# Altium PCB PCB2.PcbDoc (part 2 of 3)
Units mm, origin at the board's own origin, x right, y up, seen from the top; angles counter-clockwise.
Board outline 89.15 x 51.05 mm, 2 copper layers (Top Layer, Bottom Layer); 28 components, 20 nets, 117 pads, 27 vias.
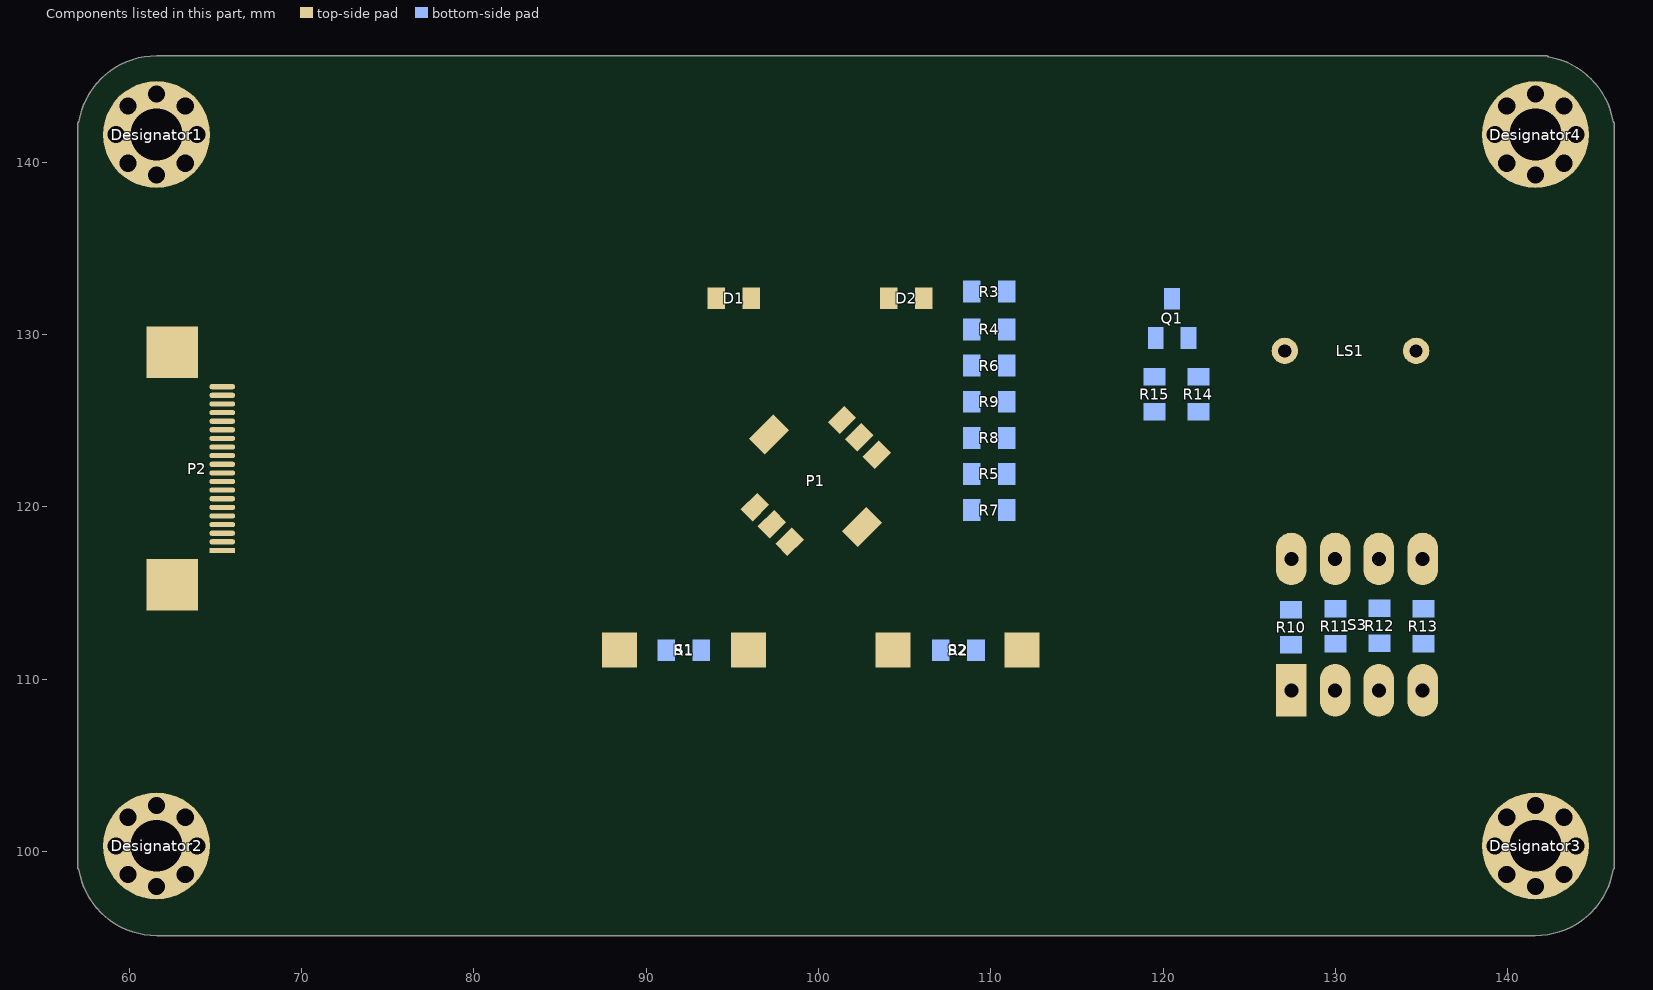
[diagram p2: the components of this part, seen from the top]

## Via types
v1: diameter 0.6, hole 0.3, Top Layer to Bottom Layer, 21 vias
v2: diameter 0.8, hole 0.4, Top Layer to Bottom Layer, 4 vias
v3: diameter 0.7, hole 0.7, Top Layer to Bottom Layer, 1 vias
v4: diameter 1, hole 1, Top Layer to Bottom Layer, 1 vias

## Nets (pads, with @x,y where several pads share a name; then routed paths per layer and width w, separated by ;. In a path a pad name is that pad's centre, name@x,y a point inside that pad or via, vN(x,y) a via of type N, cw(c..) or ccw(c..) an arc to the next point about the centre after c; other vN are vias at no path point) (continued)
copper on no net: (continued)
  Top Layer w0.009: 104.016,98.18 108.562,98.18 ; 104.016,98.189 108.562,98.189 ; 104.016,98.198 108.562,98.198 ; 104.016,98.207 108.562,98.207 ; 104.016,98.215 105.566,98.215 ; 104.016,98.224 105.584,98.224 ; 104.016,98.233 105.566,98.233 ; 104.016,98.242 105.521,98.242 ; 104.016,98.251 105.53,98.251 ; 104.016,98.26 105.468,98.26 ; 104.016,98.269 105.468,98.269 ; 104.016,98.278 105.406,98.278 ; 104.016,98.287 105.432,98.287 ; 104.016,98.295 105.432,98.295 ; 104.016,98.304 105.37,98.304 ; 104.016,98.313 105.388,98.313 ; 104.016,98.322 105.344,98.322 ; 104.016,98.331 105.326,98.331 ; 104.016,98.34 105.281,98.34 ; 104.016,98.349 105.29,98.349 ; 104.016,98.358 105.299,98.358 ; 104.016,98.367 105.228,98.367 ; 104.016,98.375 105.255,98.375 ; 104.016,98.384 105.219,98.384 ; 104.016,98.393 105.201,98.393 ; 104.016,98.402 105.175,98.402 ; 104.016,98.411 105.184,98.411 ; 104.016,98.42 105.157,98.42 ; 104.016,98.429 105.121,98.429 ; 104.016,98.438 105.139,98.438 ; 104.016,98.447 105.112,98.447 ; 104.016,98.455 105.104,98.455 ; 104.016,98.464 105.086,98.464 ; 104.016,98.473 105.059,98.473 ; 104.016,98.482 105.05,98.482 ; 104.016,98.491 105.041,98.491 ; 104.016,98.5 105.041,98.5 ; 104.016,98.509 104.997,98.509 ; 104.016,98.518 104.961,98.518 ; 104.016,98.527 104.979,98.527 ; 104.016,98.535 104.979,98.535 ; 104.016,98.544 104.952,98.544 ; 104.016,98.553 104.943,98.553 ; 104.016,98.562 104.926,98.562 ; 104.016,98.571 104.935,98.571 ; 104.016,98.58 104.899,98.58 ; 104.016,98.589 104.899,98.589 ; 104.016,98.598 104.899,98.598 ; 104.016,98.607 104.863,98.607 ; 104.016,98.615 104.881,98.615 ; 104.016,98.624 104.837,98.624 ; 104.016,98.633 104.855,98.633 ; 104.016,98.642 104.819,98.642 ; 104.016,98.651 104.801,98.651 ; 104.016,98.66 104.828,98.66 ; 104.016,98.669 104.801,98.669 ; 104.016,98.678 104.801,98.678 ; 104.016,98.687 104.775,98.687 ; 104.016,98.696 104.783,98.696 ; 104.016,98.704 104.748,98.704 ; 104.016,98.713 104.739,98.713 ; 104.016,98.722 104.766,98.722 ; 104.016,98.731 104.721,98.731 ; 104.016,98.74 104.739,98.74 ; 104.016,98.749 104.712,98.749 ; 104.016,98.758 104.712,98.758 ; 104.016,98.767 104.686,98.767 ; 104.016,98.776 104.695,98.776 ; 104.016,98.784 104.677,98.784 ; 104.016,98.793 104.677,98.793 ; 104.016,98.802 104.659,98.802 ; 104.016,98.811 104.659,98.811 ; 104.016,98.82 104.659,98.82 ; 104.016,98.829 104.641,98.829 ; 104.016,98.838 104.641,98.838 ; 104.016,98.847 104.606,98.847 ; 104.016,98.856 104.615,98.856 ; 104.016,98.864 104.597,98.864 ; 104.016,98.873 104.597,98.873 ; 104.016,98.882 104.579,98.882 ; 104.016,98.891 104.579,98.891 ; 104.016,98.9 104.579,98.9 ; 104.016,98.909 104.561,98.909 ; 104.016,98.918 104.561,98.918 ; 104.016,98.927 104.535,98.927 ; 104.016,98.936 104.535,98.936 ; 104.016,98.944 104.526,98.944 ; 104.016,98.953 104.517,98.953 ; 104.016,98.962 104.526,98.962 ; 104.016,98.971 104.517,98.971 ; 104.016,98.98 104.499,98.98 ; 104.016,98.989 104.481,98.989 ; 104.016,98.998 104.472,98.998 ; 104.016,99.007 104.472,99.007 ; 104.016,99.016 104.481,99.016 ; 104.016,99.024 104.472,99.024 ; 104.016,99.033 104.463,99.033 ; 104.016,99.042 104.455,99.042 ; 104.016,99.051 104.437,99.051 ; 104.016,99.06 104.455,99.06 ; 104.016,99.069 104.437,99.069 ; 104.016,99.078 104.437,99.078 ; 104.016,99.087 104.437,99.087 ; 104.016,99.096 104.419,99.096 ; 104.016,99.104 104.41,99.104 ; 104.016,99.113 104.392,99.113 ; 104.016,99.122 104.401,99.122 ; 104.016,99.131 104.383,99.131 ; 104.016,99.14 104.392,99.14 ; 104.016,99.149 104.375,99.149 ; 104.016,99.158 104.375,99.158 ; 104.016,99.167 104.357,99.167 ; 104.016,99.176 104.357,99.176 ; 104.016,99.184 104.375,99.184 ; 104.016,99.193 104.348,99.193 ; 104.016,99.202 104.348,99.202 ; 104.016,99.211 104.312,99.211 ; 104.016,99.22 104.339,99.22 ; 104.016,99.229 104.312,99.229 ; 104.016,99.238 104.339,99.238 ; 104.016,99.247 104.321,99.247 ; 104.016,99.256 104.312,99.256 ; 104.016,99.264 104.321,99.264 ; 104.016,99.273 104.312,99.273 ; 104.016,99.282 104.312,99.282 ; 104.016,99.291 104.295,99.291 ; 104.016,99.3 104.295,99.3 ; 104.016,99.309 104.277,99.309 ; 104.016,99.318 104.286,99.318 ; 104.016,99.327 104.277,99.327 ; 104.016,99.336 104.277,99.336 ; 104.016,99.344 104.268,99.344 ; 104.016,99.353 104.25,99.353 ; 104.016,99.362 104.25,99.362 ; 104.016,99.371 104.25,99.371 ; 104.016,99.38 104.25,99.38 ; 104.016,99.389 104.25,99.389 ; 104.016,99.398 104.25,99.398 ; 104.016,99.407 104.232,99.407 ; 104.016,99.416 104.232,99.416 ; 104.016,99.424 104.232,99.424 ; 104.016,99.433 104.215,99.433 ; 104.016,99.442 104.215,99.442 ; 104.016,99.451 104.223,99.451 ; 104.016,99.46 104.215,99.46 ; 104.016,99.469 104.215,99.469 ; 104.016,99.478 104.197,99.478 ; 104.016,99.487 104.197,99.487 ; 104.016,99.496 104.206,99.496 ; 104.016,99.504 104.197,99.504 ; 104.016,99.513 104.197,99.513 ; 104.016,99.522 104.17,99.522 ; 104.016,99.531 104.17,99.531 ; 104.016,99.54 104.17,99.54 ; 104.016,99.549 104.17,99.549 ; 104.016,99.558 104.152,99.558 ; 104.016,99.567 104.17,99.567 ; 104.016,99.576 104.17,99.576 ; 104.016,99.585 104.152,99.585 ; 104.016,99.593 104.152,99.593 ; 104.016,99.602 104.152,99.602 ; 104.016,99.611 104.152,99.611 ; 104.016,99.62 104.152,99.62 ; 104.016,99.629 104.152,99.629 ; 104.016,99.638 104.134,99.638 ; 104.016,99.647 104.134,99.647 ; 104.016,99.656 104.134,99.656 ; 104.016,99.665 104.134,99.665 ; 104.016,99.673 104.126,99.673 ; 104.016,99.682 104.108,99.682 ; 104.016,99.691 104.134,99.691 ; 104.016,99.7 104.108,99.7 ; 104.016,99.709 104.117,99.709 ; 104.016,99.718 104.108,99.718 ; 104.016,99.727 104.108,99.727 ; 104.016,99.736 104.108,99.736 ; 104.016,99.745 104.108,99.745 ; 104.016,99.753 104.099,99.753 ; 104.016,99.762 104.099,99.762 ; 104.016,99.771 104.09,99.771 ; 104.016,99.78 104.099,99.78 ; 104.016,99.789 104.09,99.789 ; 104.016,99.798 104.09,99.798 ; 104.016,99.807 104.072,99.807 ; 104.016,99.816 104.09,99.816 ; 104.016,99.825 104.072,99.825 ; 104.016,99.833 104.09,99.833 ; 104.016,99.842 104.09,99.842 ; 104.016,99.851 104.09,99.851 ; 104.016,99.86 104.072,99.86 ; 104.016,99.869 104.072,99.869 ; 104.016,99.878 104.046,99.878 ; 104.016,99.887 104.072,99.887 ; 104.016,99.896 104.072,99.896 ; 104.016,99.905 104.054,99.905 ; 104.016,99.913 104.046,99.913 ; 104.016,99.922 104.072,99.922 ; 104.016,99.931 104.054,99.931 ; 104.016,99.94 104.063,99.94 ; 104.016,99.949 104.046,99.949 ; 104.016,99.958 104.046,99.958 ; 104.016,99.967 104.037,99.967 ; 104.016,99.976 104.046,99.976 ; 104.016,99.985 104.046,99.985 ; 104.016,99.993 104.037,99.993 ; 104.016,100.002 104.037,100.002 ; 104.016,100.011 104.046,100.011 ; 104.016,100.02 104.046,100.02 ; 104.016,100.029 104.046,100.029 ; 104.016,100.038 104.046,100.038 ; 104.016,100.047 104.046,100.047 ; 104.016,100.056 104.046,100.056 ; 104.016,100.065 104.037,100.065 ; 104.016,100.073 104.037,100.073 ; 104.016,100.082 104.037,100.082 ; 104.016,100.091 104.037,100.091 ; 104.016,100.1 104.037,100.1 ; 104.016,100.109 104.037,100.109 ; 104.016,100.118 104.037,100.118 ; 104.016,100.127 104.037,100.127 ; 104.016,100.145 104.037,100.145 ; 104.016,100.153 104.037,100.153 ; 104.016,100.162 104.028,100.162 ; 104.016,100.18 104.028,100.18 ; 104.016,100.207 104.019,100.207 ; 104.016,100.233 104.019,100.233 ; 104.016,100.242 104.019,100.242 ; 104.016,100.269 104.019,100.269 ; 104.016,100.278 104.028,100.278 ; 104.016,100.536 104.019,100.536 ; 104.016,100.545 104.028,100.545 ; 104.016,100.562 104.019,100.562 ; 104.016,100.571 104.037,100.571 ; 104.016,100.589 104.037,100.589 ; 104.016,100.607 104.037,100.607 ; 104.016,100.616 104.028,100.616 ; 104.016,100.625 104.037,100.625 ; 104.016,100.634 104.037,100.634 ; 104.016,100.642 104.037,100.642 ; 104.016,100.651 104.019,100.651 ; 104.016,100.66 104.037,100.66 ; 104.016,100.669 104.037,100.669 ; 104.016,100.678 104.037,100.678 ; 104.016,100.687 104.046,100.687 ; 104.016,100.696 104.037,100.696 ; 104.016,100.705 104.037,100.705 ; 104.016,100.714 104.037,100.714 ; 104.016,100.722 104.037,100.722 ; 104.016,100.731 104.037,100.731 ; 104.016,100.74 104.037,100.74 ; 104.016,100.749 104.037,100.749 ; 104.016,100.758 104.037,100.758 ; 104.016,100.767 104.037,100.767 ; 104.016,100.776 104.046,100.776 ; 104.016,100.785 104.046,100.785 ; 104.016,100.794 104.046,100.794 ; 104.016,100.802 104.046,100.802 ; 104.016,100.811 104.037,100.811 ; 104.016,100.82 104.046,100.82 ; 104.016,100.829 104.046,100.829 ; 104.016,100.838 104.046,100.838 ; 104.016,100.847 104.046,100.847 ; 104.016,100.856 104.054,100.856 ; 104.016,100.865 104.046,100.865 ; 104.016,100.874 104.054,100.874 ; 104.016,100.882 104.072,100.882 ; 104.016,100.891 104.046,100.891 ; 104.016,100.9 104.046,100.9 ; 104.016,100.909 104.054,100.909 ; 104.016,100.918 104.081,100.918 ; 104.016,100.927 104.072,100.927 ; 104.016,100.936 104.081,100.936 ; 104.016,100.945 104.09,100.945 ; 104.016,100.954 104.072,100.954 ; 104.016,100.962 104.09,100.962 ; 104.016,100.971 104.09,100.971 ; 104.016,100.98 104.09,100.98 ; 104.016,100.989 104.099,100.989 ; 104.016,100.998 104.09,100.998 ; 104.016,101.007 104.09,101.007 ; 104.016,101.016 104.09,101.016 ; 104.016,101.025 104.099,101.025 ; 104.016,101.034 104.09,101.034 ; 104.016,101.042 104.09,101.042 ; 104.016,101.051 104.108,101.051 ; 104.016,101.06 104.108,101.06 ; 104.016,101.069 104.108,101.069 ; 104.016,101.078 104.117,101.078 ; 104.016,101.087 104.108,101.087 ; 104.016,101.096 104.108,101.096 ; 104.016,101.105 104.108,101.105 ; 104.016,101.114 104.134,101.114 ; 104.016,101.122 104.134,101.122 ; 104.016,101.131 104.134,101.131 ; 104.016,101.14 104.143,101.14 ; 104.016,101.149 104.143,101.149 ; 104.016,101.158 104.152,101.158 ; 104.016,101.167 104.134,101.167 ; 104.016,101.176 104.152,101.176 ; 104.016,101.185 104.152,101.185 ; 104.016,101.194 104.152,101.194 ; 104.016,101.202 104.152,101.202 ; 104.016,101.211 104.152,101.211 ; 104.016,101.22 104.17,101.22 ; 104.016,101.229 104.152,101.229 ; 104.016,101.238 104.17,101.238 ; 104.016,101.247 104.17,101.247 ; 104.016,101.256 104.179,101.256 ; 104.016,101.265 104.179,101.265 ; 104.016,101.274 104.179,101.274 ; 104.016,101.282 104.17,101.282 ; 104.016,101.291 104.197,101.291 ; 104.016,101.3 104.197,101.3 ; 104.016,101.309 104.215,101.309 ; 104.016,101.318 104.223,101.318 ; 104.016,101.327 104.215,101.327 ; 104.016,101.336 104.215,101.336 ; 104.016,101.345 104.215,101.345 ; 104.016,101.354 104.232,101.354 ; 104.016,101.363 104.232,101.363 ; 104.016,101.371 104.223,101.371 ; 104.016,101.38 104.232,101.38 ; 104.016,101.389 104.241,101.389 ; 104.016,101.398 104.232,101.398 ; 104.016,101.407 104.232,101.407 ; 104.016,101.416 104.259,101.416 ; 104.016,101.425 104.25,101.425 ; 104.016,101.434 104.25,101.434 ; 104.016,101.443 104.25,101.443 ; 104.016,101.451 104.277,101.451 ; 104.016,101.46 104.286,101.46 ; 104.016,101.469 104.277,101.469 ; 104.016,101.478 104.295,101.478 ; 104.016,101.487 104.295,101.487 ; 104.016,101.496 104.295,101.496 ; 104.016,101.505 104.295,101.505 ; 104.016,101.514 104.295,101.514 ; 104.016,101.523 104.312,101.523 ; 104.016,101.531 104.312,101.531 ; 104.016,101.54 104.321,101.54 ; 104.016,101.549 104.312,101.549 ; 104.016,101.558 104.339,101.558 ; 104.016,101.567 104.348,101.567 ; 104.016,101.576 104.339,101.576 ; 104.016,101.585 104.348,101.585 ; 104.016,101.594 104.339,101.594 ; 104.016,101.603 104.348,101.603 ; 104.016,101.611 104.348,101.611 ; 104.016,101.62 104.375,101.62 ; 104.016,101.629 104.357,101.629 ; 104.016,101.638 104.375,101.638 ; 104.016,101.647 104.375,101.647 ; 104.016,101.656 104.392,101.656 ; 104.016,101.665 104.392,101.665 ; 104.016,101.674 104.392,101.674 ; 104.016,101.683 104.392,101.683 ; 104.016,101.691 104.41,101.691 ; 104.016,101.7 104.437,101.7 ; 104.016,101.709 104.428,101.709 ; 104.016,101.718 104.437,101.718 ; 104.016,101.727 104.455,101.727 ; 104.016,101.736 104.437,101.736 ; 104.016,101.745 104.455,101.745 ; 104.016,101.754 104.455,101.754 ; 104.016,101.763 104.463,101.763 ; 104.016,101.771 104.463,101.771 ; 104.016,101.78 104.499,101.78 ; 104.016,101.789 104.499,101.789 ; 104.016,101.798 104.499,101.798 ; 104.016,101.807 104.508,101.807 ; 104.016,101.816 104.517,101.816 ; 104.016,101.825 104.499,101.825 ; 104.016,101.834 104.517,101.834 ; 104.016,101.843 104.535,101.843 ; 104.016,101.851 104.535,101.851 ; 104.016,101.86 104.535,101.86 ; 104.016,101.869 104.561,101.869 ; 104.016,101.878 104.561,101.878 ; 104.016,101.887 104.579,101.887 ; 104.016,101.896 104.561,101.896 ; 104.016,101.905 104.588,101.905 ; 104.016,101.914 104.579,101.914 ; 104.016,101.923 104.597,101.923 ; 104.016,101.931 104.606,101.931 ; 104.016,101.94 104.615,101.94 ; 104.016,101.949 104.615,101.949 ; 104.016,101.958 104.615,101.958 ; 104.016,101.967 104.641,101.967 ; 104.016,101.976 104.641,101.976 ; 104.016,101.985 104.659,101.985 ; 104.016,101.994 104.659,101.994 ; 104.016,102.003 104.695,102.003 ; 104.016,102.011 104.677,102.011 ; 104.016,102.02 104.686,102.02 ; 104.016,102.029 104.695,102.029 ; 104.016,102.038 104.703,102.038 ; 104.016,102.047 104.721,102.047 ; 104.016,102.056 104.712,102.056 ; 104.016,102.065 104.739,102.065 ; 104.016,102.074 104.739,102.074 ; 104.016,102.083 104.766,102.083 ; 104.016,102.091 104.766,102.091 ; 104.016,102.1 104.801,102.1 ; 104.016,102.109 104.783,102.109 ; 104.016,102.118 104.783,102.118 ; 104.016,102.127 104.801,102.127 ; 104.016,102.136 104.801,102.136 ; 104.016,102.145 104.837,102.145 ; 104.016,102.154 104.855,102.154 ; 104.016,102.163 104.863,102.163 ; 104.016,102.171 104.872,102.171 ; 104.016,102.18 104.89,102.18 ; 104.016,102.189 104.881,102.189 ; 104.016,102.198 104.881,102.198 ; 104.016,102.207 104.935,102.207 ; 104.016,102.216 104.908,102.216 ; 104.016,102.225 104.943,102.225 ; 104.016,102.234 104.961,102.234 ; 104.016,102.243 104.97,102.243 ; 104.016,102.252 104.961,102.252 ; 104.016,102.26 104.97,102.26 ; 104.016,102.269 104.997,102.269 ; 104.016,102.278 104.997,102.278 ; 104.016,102.287 105.023,102.287 ; 104.016,102.296 105.041,102.296 ; 104.016,102.305 105.059,102.305 ; 104.016,102.314 105.05,102.314 ; 104.016,102.323 105.059,102.323 ; 104.016,102.332 105.104,102.332 ; 104.016,102.34 105.086,102.34 ; 104.016,102.349 105.121,102.349 ; 104.016,102.358 105.121,102.358 ; 104.016,102.367 105.166,102.367 ; 104.016,102.376 105.139,102.376 ; 104.016,102.385 105.148,102.385 ; 104.016,102.394 105.201,102.394 ; 104.016,102.403 105.255,102.403 ; 104.016,102.412 105.237,102.412 ; 104.016,102.42 105.246,102.42 ; 104.016,102.429 105.281,102.429 ; 104.016,102.438 105.264,102.438 ; 104.016,102.447 105.299,102.447 ; 104.016,102.456 105.308,102.456 ; 104.016,102.465 105.361,102.465 ; 104.016,102.474 105.344,102.474 ; 104.016,102.483 105.344,102.483 ; 104.016,102.492 105.424,102.492 ; 104.016,102.5 105.406,102.5 ; 104.016,102.509 105.424,102.509 ; 104.016,102.518 105.45,102.518 ; 104.016,102.527 105.495,102.527 ; 104.016,102.536 105.486,102.536 ; 104.016,102.545 105.548,102.545 ; 104.016,102.554 105.584,102.554 ; 104.016,102.563 105.566,102.563 ; 104.016,102.572 105.61,102.572 ; 104.016,102.58 105.637,102.58 ; 104.016,102.589 105.69,102.589 ; 104.016,102.598 105.699,102.598 ; 104.016,102.607 105.761,102.607 ; 104.016,102.616 105.77,102.616 ; 104.016,102.625 105.788,102.625 ; 104.016,102.634 105.841,102.634 ; 104.016,102.643 105.868,102.643 ; 104.016,102.652 105.966,102.652 ; 104.016,102.66 106.001,102.66 ; 104.016,102.669 106.135,102.669 ; 104.016,102.678 106.135,102.678 ; 104.016,102.687 106.224,102.687 ; 104.016,102.696 108.562,102.696 ; 104.016,102.705 108.562,102.705 ; 104.016,102.714 108.562,102.714 ; 104.016,102.723 108.562,102.723 ; 104.025,100.171 104.037,100.171 ; 104.025,100.189 104.037,100.189 ; 104.025,100.198 104.037,100.198 ; 104.025,100.296 104.028,100.296 ; 104.025,100.305 104.028,100.305 ; 104.025,100.482 104.028,100.482 ; 104.025,100.598 104.028,100.598 ; 104.034,100.136 104.037,100.136 ; 104.034,100.207 104.037,100.207 ; 104.034,100.216 104.037,100.216 ; 104.034,100.225 104.037,100.225 ; 104.034,100.251 104.037,100.251 ; 104.034,100.26 104.037,100.26 ; 104.034,100.287 104.037,100.287 ; 104.034,100.34 104.037,100.34 ; 104.034,100.393 104.037,100.393 ; 104.034,100.429 104.037,100.429 ; 104.034,100.456 104.037,100.456 ; 104.034,100.527 104.037,100.527 ; 104.034,100.536 104.037,100.536 ; 104.034,100.554 104.037,100.554 ; 104.034,100.562 104.037,100.562 ; 104.034,100.58 104.037,100.58 ; 104.034,100.651 104.037,100.651 ; 104.06,99.878 104.072,99.878 ; 104.06,99.913 104.063,99.913 ; 104.06,99.958 104.063,99.958 ; 104.06,99.976 104.063,99.976 ; 104.06,100.811 104.072,100.811 ; 104.06,100.829 104.072,100.829 ; 104.06,100.847 104.072,100.847 ; 104.06,100.891 104.072,100.891 ; 104.06,100.9 104.072,100.9 ; 104.069,99.905 104.072,99.905 ; 104.069,99.931 104.072,99.931 ; 104.069,99.949 104.072,99.949 ; 104.069,99.967 104.072,99.967 ; 104.069,99.993 104.072,99.993 ; 104.069,100.838 104.072,100.838 ; 104.069,100.856 104.072,100.856 ; 104.069,100.865 104.072,100.865 ; 104.069,100.874 104.072,100.874 ; 104.087,99.807 104.09,99.807 ; 104.087,99.825 104.09,99.825 ; 104.087,100.891 104.09,100.891 ; 104.087,100.954 104.09,100.954 ; 104.105,99.771 104.108,99.771 ; 104.105,99.789 104.108,99.789 ; 104.105,99.816 104.108,99.816 ; 104.105,100.998 104.108,100.998 ; 104.105,101.034 104.108,101.034 ; 104.105,101.042 104.108,101.042 ; 104.114,99.753 104.117,99.753 ; 104.123,99.682 104.143,99.682 ; 104.123,99.7 104.126,99.7 ; 104.123,99.727 104.134,99.727 ; 104.123,101.051 104.126,101.051 ; 104.123,101.087 104.134,101.087 ; 104.123,101.096 104.143,101.096 ; 104.132,99.709 104.134,99.709 ; 104.132,99.718 104.134,99.718 ; 104.132,99.753 104.134,99.753 ; 104.149,99.638 104.152,99.638 ; 104.149,99.665 104.152,99.665 ; 104.149,101.131 104.152,101.131 ; 104.149,101.167 104.152,101.167 ; 104.167,99.558 104.17,99.558 ; 104.167,101.202 104.17,101.202 ; 104.167,101.211 104.17,101.211 ; 104.167,101.229 104.17,101.229 ; 104.185,99.522 104.197,99.522 ; 104.185,101.282 104.197,101.282 ; 104.194,99.54 104.197,99.54 ; 104.194,99.549 104.197,99.549 ; 104.194,101.256 104.197,101.256 ; 104.194,101.274 104.197,101.274 ; 104.212,99.478 104.215,99.478 ; 104.212,99.487 104.215,99.487 ; 104.212,99.504 104.215,99.504 ; 104.229,99.433 104.232,99.433 ; 104.229,99.442 104.232,99.442 ; 104.229,101.336 104.232,101.336 ; 104.247,101.398 104.25,101.398 ; 104.265,99.389 104.268,99.389 ; 104.265,101.425 104.268,101.425 ; 104.265,101.443 104.268,101.443 ; 104.274,99.353 104.277,99.353 ; 104.274,101.416 104.277,101.416 ; 104.292,99.327 104.295,99.327 ; 104.309,99.291 104.312,99.291 ; 104.309,101.496 104.312,101.496 ; 104.309,101.514 104.312,101.514 ; 104.327,99.211 104.339,99.211 ; 104.327,99.229 104.339,99.229 ; 104.327,99.256 104.33,99.256 ; 104.336,99.247 104.339,99.247 ; 104.336,99.264 104.339,99.264 ; 104.336,101.54 104.339,101.54 ; 104.336,101.549 104.339,101.549 ; 104.363,101.603 104.366,101.603 ; 104.363,101.611 104.375,101.611 ; 104.372,99.167 104.375,99.167 ; 104.372,99.193 104.375,99.193 ; 104.372,101.629 104.375,101.629 ; 104.389,101.62 104.392,101.62 ; 104.407,99.113 104.41,99.113 ; 104.407,101.683 104.41,101.683 ; 104.434,99.096 104.437,99.096 ; 104.452,99.051 104.455,99.051 ; 104.487,98.998 104.499,98.998 ; 104.496,98.989 104.508,98.989 ; 104.496,99.007 104.499,99.007 ; 104.514,98.98 104.517,98.98 ; 104.514,101.798 104.517,101.798 ; 104.514,101.825 104.517,101.825 ; 104.532,101.825 104.535,101.825 ; 104.549,101.843 104.552,101.843 ; 104.558,98.936 104.561,98.936 ; 104.558,101.86 104.561,101.86 ; 104.576,101.86 104.579,101.86 ; 104.576,101.878 104.579,101.878 ; 104.576,101.896 104.579,101.896 ; 104.594,101.914 104.597,101.914 ; 104.603,99.46 104.606,99.46 ; 104.603,99.478 104.606,99.478 ; 104.62,99.416 104.623,99.416 ; 104.62,99.433 104.908,99.433 ; 104.62,99.442 104.632,99.442 ; 104.62,99.451 104.926,99.451 ; 104.62,99.46 104.863,99.46 ; 104.62,99.469 104.819,99.469 ; 104.62,99.478 104.828,99.478 ; 104.62,99.487 104.837,99.487 ; 104.629,101.94 104.632,101.94 ; 104.629,101.958 104.632,101.958 ; 104.638,101.949 104.641,101.949 ; 104.647,99.442 104.899,99.442 ; 104.647,99.496 104.65,99.496 ; 104.656,99.416 104.943,99.416 ; 104.656,99.424 104.926,99.424 ; 104.656,99.504 104.775,99.504 ; 104.665,99.398 104.979,99.398 ; 104.665,99.407 104.961,99.407 ; 104.665,99.496 104.757,99.496 ; 104.674,98.802 104.677,98.802 ; 104.683,99.371 104.686,99.371 ; 104.683,99.38 104.988,99.38 ; 104.7,99.371 104.961,99.371 ; 104.7,99.389 104.979,99.389 ; 104.709,99.362 104.997,99.362 ; 104.709,102.029 104.712,102.029 ; 104.718,99.353 104.997,99.353 ; 104.727,102.056 104.739,102.056 ; 104.745,99.336 105.023,99.336 ; 104.754,98.713 104.757,98.713 ; 104.754,99.344 105.023,99.344 ; 104.763,99.318 104.766,99.318 ; 104.772,98.713 104.775,98.713 ; 104.772,99.309 105.023,99.309 ; 104.772,99.327 105.041,99.327 ; 104.772,99.496 104.775,99.496 ; 104.781,99.3 104.783,99.3 ; 104.781,99.318 105.041,99.318 ; 104.789,99.291 105.041,99.291 ; 104.789,99.504 104.792,99.504 ; 104.798,99.496 104.801,99.496 ; 104.798,102.109 104.801,102.109 ; 104.798,102.118 104.801,102.118 ; 104.807,99.282 105.059,99.282 ; 104.807,99.3 105.041,99.3 ; 104.816,98.651 104.819,98.651 ; 104.816,98.669 104.819,98.669 ; 104.816,98.678 104.819,98.678 ; 104.816,99.273 105.059,99.273 ; 104.816,102.1 104.819,102.1 ; 104.816,102.127 104.819,102.127 ; 104.816,102.136 104.819,102.136 ; 104.825,99.264 104.828,99.264 ; 104.825,100.349 104.828,100.349 ; 104.825,100.367 104.828,100.367 ; 104.825,100.411 104.828,100.411 ; 104.825,100.438 104.828,100.438 ; 104.825,100.456 107.753,100.456 ; 104.825,100.482 104.828,100.482 ; 104.825,100.491 104.828,100.491 ; 104.825,100.509 104.828,100.509 ; 104.825,100.527 104.828,100.527 ; 104.825,100.545 104.828,100.545 ; 104.834,98.642 104.837,98.642 ; 104.834,99.256 105.086,99.256 ; 104.834,99.469 104.837,99.469 ; 104.834,100.385 107.735,100.385 ; 104.834,100.393 107.735,100.393 ; 104.834,100.42 107.744,100.42 ; 104.834,100.447 107.753,100.447 ; 104.834,100.474 107.717,100.474 ; 104.834,100.5 107.735,100.5 ; 104.834,100.518 107.753,100.518 ; 104.834,100.571 107.735,100.571 ; 104.834,100.598 107.735,100.598 ; 104.843,99.22 104.846,99.22 ; 104.843,99.229 105.086,99.229 ; 104.843,99.238 104.846,99.238 ; 104.843,99.247 105.086,99.247 ; 104.843,99.264 105.086,99.264 ; 104.843,100.207 104.846,100.207 ; 104.843,100.233 104.846,100.233 ; 104.843,100.251 104.846,100.251 ; 104.843,100.26 104.846,100.26 ; 104.843,100.269 107.735,100.269 ; 104.843,100.287 104.855,100.287 ; 104.843,100.305 107.717,100.305 ; 104.843,100.322 104.846,100.322 ; 104.843,100.331 107.735,100.331 ; 104.843,100.349 107.735,100.349 ; 104.843,100.367 107.708,100.367 ; 104.843,100.376 107.735,100.376 ; 104.843,100.402 107.717,100.402 ; 104.843,100.411 107.735,100.411 ; 104.843,100.429 107.717,100.429 ; 104.843,100.438 107.735,100.438 ; 104.843,100.465 107.735,100.465 ; 104.843,100.482 107.735,100.482 ; 104.843,100.491 107.735,100.491 ; 104.843,100.509 107.753,100.509 ; 104.843,100.527 107.735,100.527 ; 104.843,100.536 107.735,100.536 ; 104.843,100.545 107.735,100.545 ; 104.843,100.554 107.708,100.554 ; 104.843,100.562 107.753,100.562 ; 104.843,100.58 107.735,100.58 ; 104.843,100.589 107.744,100.589 ; 104.843,100.607 107.744,100.607 ; 104.843,100.616 107.735,100.616 ; 104.843,100.625 107.717,100.625 ; 104.843,100.634 104.855,100.634 ; 104.843,100.642 107.717,100.642 ; 104.843,100.651 104.855,100.651 ; 104.843,100.66 107.735,100.66 ; 104.843,100.678 104.855,100.678 ; 104.843,100.696 104.846,100.696 ; 104.843,100.705 107.717,100.705 ; 104.852,98.624 104.855,98.624 ; 104.852,99.211 105.086,99.211 ; 104.852,99.469 104.855,99.469 ; 104.852,100.225 104.855,100.225 ; 104.852,100.242 104.855,100.242 ; 104.852,100.34 107.717,100.34 ; 104.852,100.669 107.717,100.669 ; 104.852,100.687 104.855,100.687 ; 104.852,100.731 104.855,100.731 ; 104.861,99.238 105.095,99.238 ; 104.861,100.251 107.717,100.251 ; 104.861,100.26 107.708,100.26 ; 104.861,100.278 107.717,100.278 ; 104.861,100.296 107.717,100.296 ; 104.861,100.313 107.708,100.313 ; 104.861,100.322 107.735,100.322 ; 104.861,100.358 107.717,100.358 ; 104.869,99.22 105.086,99.22 ; 104.869,100.136 104.872,100.136 ; 104.869,100.162 104.872,100.162 ; 104.869,100.171 107.708,100.171 ; 104.869,100.18 107.708,100.18 ; 104.869,100.189 107.69,100.189 ; 104.869,100.198 107.708,100.198 ; 104.869,100.207 107.708,100.207 ; 104.869,100.216 107.708,100.216 ; 104.869,100.225 107.717,100.225 ; 104.869,100.233 107.717,100.233 ; 104.869,100.242 107.708,100.242 ; 104.869,100.287 107.735,100.287 ; 104.869,100.634 107.735,100.634 ; 104.869,100.651 107.708,100.651 ; 104.869,100.678 107.708,100.678 ; 104.869,100.687 107.708,100.687 ; 104.869,100.696 107.708,100.696 ; 104.869,100.714 107.708,100.714 ; 104.869,100.722 107.69,100.722 ; 104.869,100.731 107.708,100.731 ; 104.869,100.74 107.708,100.74 ; 104.869,100.749 104.872,100.749 ; 104.869,100.767 107.708,100.767 ; 104.878,98.607 104.881,98.607 ; 104.878,99.46 104.881,99.46 ; 104.878,100.127 107.699,100.127 ; 104.878,100.145 107.69,100.145 ; 104.878,100.153 107.699,100.153 ; 104.878,100.758 107.708,100.758 ; 104.878,100.776 107.708,100.776 ; 104.878,102.163 104.881,102.163 ; 104.887,99.167 105.121,99.167 ; 104.887,99.176 104.89,99.176 ; 104.887,99.184 105.121,99.184 ; 104.887,99.193 105.112,99.193 ; 104.887,99.202 105.121,99.202 ; 104.887,100.082 104.89,100.082 ; 104.887,100.091 107.69,100.091 ; 104.887,100.1 107.69,100.1 ; 104.887,100.109 107.69,100.109 ; 104.887,100.118 107.69,100.118 ; 104.887,100.136 107.69,100.136 ; 104.887,100.162 107.708,100.162 ; 104.887,100.749 107.708,100.749 ; 104.887,100.785 107.69,100.785 ; 104.887,100.794 107.699,100.794 ; 104.887,100.802 107.699,100.802 ; 104.887,100.811 107.69,100.811 ; 104.887,100.82 107.69,100.82 ; 104.896,99.149 105.139,99.149 ; 104.896,99.46 104.899,99.46 ; 104.896,100.065 107.673,100.065 ; 104.896,100.073 107.673,100.073 ; 104.896,100.829 107.682,100.829 ; 104.896,100.838 107.673,100.838 ; 104.896,102.189 104.899,102.189 ; 104.896,102.198 104.899,102.198 ; 104.905,99.104 104.908,99.104 ; 104.905,99.131 104.917,99.131 ; 104.905,99.14 105.184,99.14 ; 104.905,99.158 105.139,99.158 ; 104.905,99.176 105.121,99.176 ; 104.905,100.02 104.908,100.02 ; 104.905,100.029 107.673,100.029 ; 104.905,100.038 107.673,100.038 ; 104.905,100.047 107.673,100.047 ; 104.905,100.056 107.673,100.056 ; 104.905,100.082 107.69,100.082 ; 104.905,100.847 107.673,100.847 ; 104.905,100.856 107.673,100.856 ; 104.905,100.865 107.673,100.865 ; 104.905,100.874 104.908,100.874 ; 104.905,100.882 107.655,100.882 ; 104.914,99.113 104.917,99.113 ; 104.914,99.122 104.917,99.122 ; 104.914,99.985 104.917,99.985 ; 104.914,100.011 104.917,100.011 ; 104.914,100.9 104.917,100.9 ; 104.923,99.433 104.935,99.433 ; 104.923,100.002 107.646,100.002 ; 104.923,100.02 107.673,100.02 ; 104.923,100.874 107.646,100.874 ; 104.923,100.891 107.655,100.891 ; 104.923,102.216 104.926,102.216 ; 104.932,99.069 104.935,99.069 ; 104.932,99.078 104.935,99.078 ; 104.932,99.087 104.935,99.087 ; 104.932,99.096 104.935,99.096 ; 104.932,99.104 105.237,99.104 ; 104.932,99.113 105.192,99.113 ; 104.932,99.122 105.201,99.122 ; 104.932,99.131 105.166,99.131 ; 104.932,99.985 107.646,99.985 ; 104.932,99.993 107.646,99.993 ; 104.932,100.011 107.646,100.011 ; 104.932,100.9 107.655,100.9 ; 104.932,100.909 104.935,100.909 ; 104.932,100.936 104.935,100.936 ; 104.932,100.945 104.935,100.945 ; 104.941,98.562 104.952,98.562 ; 104.941,99.424 104.943,99.424 ; 104.941,99.958 107.637,99.958 ; 104.941,99.967 107.628,99.967 ; 104.941,99.976 107.628,99.976 ; 104.941,100.918 107.646,100.918 ; 104.949,99.033 104.952,99.033 ; 104.949,99.051 105.29,99.051 ; 104.949,99.06 105.299,99.06 ; 104.949,99.069 105.246,99.069 ; 104.949,99.078 105.281,99.078 ; 104.949,99.087 105.264,99.087 ; 104.949,99.096 105.228,99.096 ; 104.949,99.94 107.628,99.94 ; 104.949,99.949 107.628,99.949 ; 104.949,100.909 107.646,100.909 ; 104.949,100.927 107.628,100.927 ; 104.949,100.936 107.637,100.936 ; 104.949,100.945 107.628,100.945 ; 104.949,100.954 107.628,100.954 ; 104.958,98.553 104.961,98.553 ; 104.958,99.922 107.61,99.922 ; 104.958,99.931 107.628,99.931 ; 104.958,100.971 104.961,100.971 ; 104.958,102.225 104.961,102.225 ; 104.967,98.544 104.97,98.544 ; 104.967,98.971 104.97,98.971 ; 104.967,99.007 106.864,99.007 ; 104.967,99.016 106.864,99.016 ; 104.967,99.024 106.855,99.024 ; 104.967,99.033 105.37,99.033 ; 104.967,99.042 105.37,99.042 ; 104.967,99.878 107.602,99.878 ; 104.967,99.887 107.61,99.887 ; 104.967,99.896 107.61,99.896 ; 104.967,99.905 107.61,99.905 ; 104.967,99.913 107.61,99.913 ; 104.967,100.962 107.619,100.962 ; 104.967,100.98 107.61,100.98 ; 104.976,98.518 104.979,98.518 ; 104.976,98.553 104.979,98.553 ; 104.976,98.98 104.979,98.98 ; 104.976,99.371 104.979,99.371 ; 104.976,100.971 107.619,100.971 ; 104.976,101.016 107.575,101.016 ; 104.985,98.971 104.988,98.971 ; 104.985,98.989 106.864,98.989 ; 104.985,98.998 106.855,98.998 ; 104.985,99.833 104.988,99.833 ; 104.985,99.86 107.593,99.86 ; 104.985,99.869 107.584,99.869 ; 104.985,100.989 107.602,100.989 ; 104.985,100.998 107.593,100.998 ; 104.985,101.007 107.61,101.007 ; 104.985,101.025 107.593,101.025 ; 104.994,98.944 106.864,98.944 ; 104.994,98.98 106.846,98.98 ; 104.994,101.034 107.593,101.034 ; 105.003,98.936 105.006,98.936 ; 105.003,98.953 106.846,98.953 ; 105.003,98.962 106.864,98.962 ; 105.003,98.971 106.864,98.971 ; 105.003,99.825 107.575,99.825 ; 105.003,99.833 107.575,99.833 ; 105.003,99.842 107.593,99.842 ; 105.003,99.851 107.593,99.851 ; 105.003,101.042 107.593,101.042 ; 105.003,101.069 105.006,101.069 ; 105.012,98.509 105.015,98.509 ; 105.012,98.927 106.864,98.927 ; 105.012,101.06 105.015,101.06 ; 105.029,98.909 106.855,98.909 ; 105.029,98.918 106.864,98.918 ; 105.029,98.936 106.855,98.936 ; 105.029,99.78 107.548,99.78 ; 105.029,99.789 107.548,99.789 ; 105.029,99.798 107.548,99.798 ; 105.029,99.807 107.548,99.807 ; 105.029,99.816 107.548,99.816 ; 105.029,101.051 107.548,101.051 ; 105.029,101.06 107.548,101.06 ; 105.029,101.069 107.575,101.069 ; 105.029,101.256 105.032,101.256 ; 105.029,101.274 107.548,101.274 ; 105.029,101.291 107.548,101.291 ; 105.029,101.3 107.548,101.3 ; 105.029,101.318 107.548,101.318 ; 105.029,101.327 107.548,101.327 ; 105.029,101.336 107.548,101.336 ; 105.029,101.345 107.548,101.345 ; 105.029,101.354 107.548,101.354 ; 105.029,101.363 107.548,101.363 ; 105.029,101.371 107.548,101.371 ; 105.029,101.38 107.548,101.38 ; 105.029,101.389 107.548,101.389 ; 105.029,101.398 107.548,101.398 ; 105.029,101.416 107.548,101.416 ; 105.029,101.425 107.548,101.425 ; 105.029,101.434 107.548,101.434 ; 105.029,101.443 107.548,101.443 ; 105.029,101.451 107.548,101.451 ; 105.029,101.46 105.032,101.46 ; 105.029,101.478 107.548,101.478 ; 105.029,101.487 107.548,101.487 ; 105.029,101.496 105.699,101.496 ; 105.029,101.505 105.717,101.505 ; 105.029,101.523 105.032,101.523 ; 105.029,101.531 105.032,101.531 ; 105.038,99.309 105.041,99.309 ; 105.038,99.771 107.548,99.771 ; 105.038,101.265 107.53,101.265 ; 105.038,101.282 107.548,101.282 ; 105.038,101.309 107.548,101.309 ; 105.038,101.407 107.548,101.407 ; 105.038,101.469 107.548,101.469 ; 105.038,101.514 105.664,101.514 ; 105.047,98.882 105.05,98.882 ; 105.047,98.891 106.864,98.891 ; 105.047,98.9 106.846,98.9 ; 105.047,99.762 107.513,99.762 ; 105.047,101.078 107.548,101.078 ; 105.047,101.087 107.53,101.087 ; 105.047,101.096 107.53,101.096 ; 105.047,101.105 107.53,101.105 ; 105.047,101.158 107.513,101.158 ; 105.047,101.185 107.53,101.185 ; 105.047,101.194 107.53,101.194 ; 105.047,101.202 107.53,101.202 ; 105.047,101.211 107.53,101.211 ; 105.047,101.22 107.53,101.22 ; 105.047,101.229 107.53,101.229 ; 105.047,101.238 107.539,101.238 ; 105.047,101.247 107.548,101.247 ; 105.047,101.256 107.548,101.256 ; 105.047,101.46 107.53,101.46 ; 105.047,101.523 105.664,101.523 ; 105.047,101.531 105.672,101.531 ; 105.047,101.54 105.646,101.54 ; 105.047,101.549 105.655,101.549 ; 105.047,101.558 105.601,101.558 ; 105.047,101.567 105.592,101.567 ; 105.047,101.576 105.566,101.576 ; 105.047,101.585 105.566,101.585 ; 105.047,101.594 105.05,101.594 ; 105.047,101.603 105.521,101.603 ; 105.047,101.611 105.548,101.611 ; 105.056,98.5 105.059,98.5 ; 105.056,99.291 105.059,99.291 ; 105.056,101.176 107.513,101.176 ; 105.065,98.864 105.068,98.864 ; 105.065,98.873 105.077,98.873 ; 105.065,98.882 106.846,98.882 ; 105.065,99.736 107.486,99.736 ; 105.065,99.745 107.513,99.745 ; 105.065,99.753 107.513,99.753 ; 105.065,101.114 107.513,101.114 ; 105.065,101.131 107.513,101.131 ; 105.065,101.14 107.513,101.14 ; 105.065,101.149 107.522,101.149 ; 105.065,101.167 107.522,101.167 ; 105.065,101.594 105.566,101.594 ; 105.065,101.62 105.504,101.62 ; 105.065,101.629 105.486,101.629 ; 105.065,101.638 105.459,101.638 ; 105.065,101.647 105.459,101.647 ; 105.065,101.656 105.068,101.656 ; 105.065,101.665 105.068,101.665 ; 105.065,101.674 105.077,101.674 ; 105.065,101.691 105.077,101.691 ; 105.074,98.473 105.086,98.473 ; 105.074,99.282 105.077,99.282 ; 105.074,101.122 107.513,101.122 ; 105.074,101.709 105.077,101.709 ; 105.083,98.864 106.864,98.864 ; 105.083,101.656 105.415,101.656 ; 105.083,101.665 105.406,101.665 ; 105.083,102.314 105.086,102.314 ; 105.092,98.847 106.855,98.847 ; 105.092,98.873 106.855,98.873 ; 105.092,99.718 107.486,99.718 ; 105.092,99.727 107.486,99.727 ; 105.092,101.674 105.415,101.674 ; 105.092,101.683 105.344,101.683 ; 105.092,101.691 105.361,101.691 ; 105.092,101.7 105.095,101.7 ; 105.092,101.709 105.299,101.709 ; 105.092,101.736 105.237,101.736 ; 105.101,99.211 105.104,99.211 ; 105.101,99.22 105.112,99.22 ; 105.101,101.718 105.148,101.718 ; 105.109,98.856 106.864,98.856 ; 105.109,99.7 107.477,99.7 ; 105.109,99.709 107.45,99.709 ; 105.109,101.7 105.308,101.7 ; 105.109,101.727 105.219,101.727 ; 105.118,98.455 105.121,98.455 ; 105.118,98.829 106.846,98.829 ; 105.118,99.673 107.45,99.673 ; 105.118,99.691 107.45,99.691 ; 105.127,99.193 105.13,99.193 ; 105.127,99.656 105.13,99.656 ; 105.127,99.682 107.45,99.682 ; 105.136,98.429 105.139,98.429 ; 105.136,98.838 106.846,98.838 ; 105.136,99.167 105.139,99.167 ; 105.136,99.176 105.139,99.176 ; 105.136,99.184 105.139,99.184 ; 105.136,102.358 105.139,102.358 ; 105.145,98.811 105.148,98.811 ; 105.145,99.656 107.424,99.656 ; 105.145,99.665 107.406,99.665 ; 105.154,102.376 105.157,102.376 ; 105.163,98.429 105.166,98.429 ; 105.163,98.811 105.166,98.811 ; 105.163,98.82 106.846,98.82 ; 105.163,99.149 105.166,99.149 ; 105.163,99.158 105.166,99.158 ; 105.163,101.718 105.192,101.718 ; 105.163,102.385 105.166,102.385 ; 105.172,98.784 105.175,98.784 ; 105.172,99.638 107.406,99.638 ; 105.172,99.647 107.406,99.647 ; 105.181,98.811 106.846,98.811 ; 105.181,99.131 105.184,99.131 ; 105.189,99.62 105.192,99.62 ; 105.189,99.629 107.388,99.629 ; 105.198,98.784 106.864,98.784 ; 105.198,98.793 106.846,98.793 ; 105.198,98.802 106.864,98.802 ; 105.207,99.593 105.219,99.593 ; 105.207,99.62 107.379,99.62 ; 105.207,101.718 105.21,101.718 ; 105.216,98.393 105.219,98.393 ; 105.216,99.602 105.219,99.602 ; 105.225,99.113 105.228,99.113 ; 105.225,99.611 107.344,99.611 ; 105.225,101.718 105.228,101.718 ; 105.234,98.384 105.237,98.384 ; 105.234,99.593 107.344,99.593 ; 105.234,99.602 107.335,99.602 ; 105.243,98.367 105.246,98.367 ; 105.243,98.776 106.846,98.776 ; 105.243,99.096 105.246,99.096 ; 105.243,99.576 107.308,99.576 ; 105.243,101.727 105.255,101.727 ; 105.261,98.367 105.264,98.367 ; 105.261,98.767 106.846,98.767 ; 105.261,99.069 105.264,99.069 ; 105.261,101.736 105.264,101.736 ; 105.269,99.558 105.281,99.558 ; 105.269,99.585 107.326,99.585 ; 105.278,99.069 105.281,99.069 ; 105.278,102.438 105.29,102.438 ; 105.287,99.567 107.282,99.567 ; 105.296,98.34 105.299,98.34 ; 105.296,99.54 105.299,99.54 ; 105.305,98.749 105.308,98.749 ; 105.305,98.758 105.308,98.758 ; 105.305,99.051 105.308,99.051 ; 105.305,99.531 105.308,99.531 ; 105.305,99.558 107.282,99.558 ; 105.314,99.54 107.246,99.54 ; 105.314,99.549 107.246,99.549 ; 105.314,101.709 105.326,101.709 ; 105.314,102.447 105.326,102.447 ; 105.323,99.06 105.326,99.06 ; 105.332,98.749 105.646,98.749 ; 105.332,98.758 105.672,98.758 ; 105.332,99.531 107.246,99.531 ; 105.341,99.522 105.344,99.522 ; 105.358,99.513 107.21,99.513 ; 105.358,101.683 105.37,101.683 ; 105.358,102.474 105.37,102.474 ; 105.367,99.522 107.21,99.522 ; 105.376,101.691 105.379,101.691 ; 105.385,98.304 105.388,98.304 ; 105.385,99.042 105.388,99.042 ; 105.394,99.504 107.166,99.504 ; 105.394,102.465 105.397,102.465 ; 105.403,99.033 105.406,99.033 ; 105.412,99.496 107.157,99.496 ; 105.421,98.278 105.424,98.278 ; 105.421,101.665 105.424,101.665 ; 105.421,102.5 105.424,102.5 ; 105.429,99.033 105.432,99.033 ; 105.438,98.278 105.441,98.278 ; 105.438,99.478 105.441,99.478 ; 105.438,99.487 105.441,99.487 ; 105.438,102.509 105.468,102.509 ; 105.447,98.287 105.45,98.287 ; 105.447,98.295 105.45,98.295 ; 105.456,99.469 107.095,99.469 ; 105.456,99.478 105.459,99.478 ; 105.456,99.487 107.122,99.487 ; 105.465,99.042 105.468,99.042 ; 105.465,102.518 105.477,102.518 ; 105.474,99.033 105.477,99.033 ; 105.474,99.478 107.122,99.478 ; 105.474,101.638 105.477,101.638 ; 105.483,98.26 105.495,98.26 ; 105.483,102.509 105.486,102.509 ; 105.501,99.042 105.504,99.042 ; 105.501,99.46 105.504,99.46 ; 105.501,102.536 105.504,102.536 ; 105.509,98.269 105.512,98.269 ; 105.527,99.46 107.033,99.46 ; 105.527,101.62 105.53,101.62 ; 105.527,102.527 105.539,102.527 ; 105.527,102.536 105.53,102.536 ; 105.536,98.242 105.539,98.242 ; 105.545,98.251 105.566,98.251 ; 105.545,101.603 105.548,101.603 ; 105.554,99.433 105.557,99.433 ; 105.554,99.442 105.557,99.442 ; 105.563,99.451 105.575,99.451 ; 105.563,101.603 105.566,101.603 ; 105.563,102.545 105.566,102.545 ; 105.572,98.242 105.584,98.242 ; 105.572,99.042 106.864,99.042 ; 105.572,99.433 105.584,99.433 ; 105.581,98.215 105.601,98.215 ; 105.581,98.233 106.926,98.233 ; 105.581,101.594 105.592,101.594 ; 105.589,99.442 106.953,99.442 ; 105.589,99.451 106.97,99.451 ; 105.589,101.576 105.592,101.576 ; 105.589,102.545 105.592,102.545 ; 105.589,102.563 105.592,102.563 ; 105.598,98.224 105.619,98.224 ; 105.598,99.033 106.846,99.033 ; 105.598,99.433 106.962,99.433 ; 105.607,99.416 105.61,99.416 ; 105.616,98.215 106.953,98.215 ; 105.625,99.416 105.628,99.416 ; 105.625,102.572 105.646,102.572 ; 105.634,98.224 105.637,98.224 ; 105.634,99.06 105.637,99.06 ; 105.643,99.416 105.646,99.416 ; 105.652,98.224 106.926,98.224 ; 105.652,99.051 105.655,99.051 ; 105.652,99.06 106.846,99.06 ; 105.652,99.424 106.899,99.424 ; 105.652,102.58 105.664,102.58 ; 105.661,98.251 106.926,98.251 ; 105.661,99.416 105.672,99.416 ; 105.67,98.242 106.917,98.242 ; 105.67,98.26 105.672,98.26 ; 105.67,99.051 106.846,99.051 ; 105.678,101.514 105.69,101.514 ; 105.678,101.523 105.681,101.523 ; 105.687,98.749 105.69,98.749 ; 105.687,99.416 106.846,99.416 ; 105.696,98.26 106.864,98.26 ; 105.696,98.278 106.864,98.278 ; 105.696,99.069 105.717,99.069 ; 105.696,99.087 106.846,99.087 ; 105.705,98.269 106.873,98.269 ; 105.705,98.295 106.882,98.295 ; 105.705,102.589 105.708,102.589 ; 105.714,98.287 106.882,98.287 ; 105.714,98.304 105.717,98.304 ; 105.714,98.313 106.873,98.313 ; 105.714,98.331 105.717,98.331 ; 105.714,98.34 105.717,98.34 ; 105.714,98.375 105.717,98.375 ; 105.714,98.393 105.717,98.393 ; 105.714,98.402 106.846,98.402 ; 105.714,98.42 106.846,98.42 ; 105.714,98.429 105.717,98.429 ; 105.714,98.438 106.864,98.438 ; 105.714,98.464 106.855,98.464 ; 105.714,98.473 105.717,98.473 ; 105.714,98.482 105.717,98.482 ; 105.714,98.491 105.717,98.491 ; 105.714,98.509 105.717,98.509 ; 105.714,98.518 106.846,98.518 ; 105.714,98.535 105.717,98.535 ; 105.714,98.544 105.717,98.544 ; 105.714,98.571 105.717,98.571 ; 105.714,98.58 106.864,98.58 ; 105.714,98.607 105.717,98.607 ; 105.714,98.624 105.717,98.624 ; 105.714,98.633 105.717,98.633 ; 105.714,98.66 105.717,98.66 ; 105.714,98.669 105.717,98.669 ; 105.714,98.687 105.717,98.687 ; 105.714,98.704 106.846,98.704 ; 105.714,98.713 105.717,98.713 ; 105.714,98.722 105.717,98.722 ; 105.714,98.74 106.846,98.74 ; 105.714,98.749 105.717,98.749 ; 105.714,98.758 106.846,98.758 ; 105.714,99.398 105.717,99.398 ; 105.714,102.598 105.717,102.598 ; 105.723,98.322 106.864,98.322 ; 105.723,98.349 106.864,98.349 ; 105.723,98.358 106.846,98.358 ; 105.723,98.367 106.864,98.367 ; 105.723,98.384 106.855,98.384 ; 105.723,98.447 106.864,98.447 ; 105.723,98.5 106.864,98.5 ; 105.723,98.553 106.864,98.553 ; 105.723,98.562 106.864,98.562 ; 105.723,98.598 106.846,98.598 ; 105.723,98.615 106.864,98.615 ; 105.723,98.642 106.864,98.642 ; 105.723,98.651 106.855,98.651 ; 105.723,98.678 106.864,98.678 ; 105.723,98.696 106.864,98.696 ; 105.723,98.731 106.855,98.731 ; 105.723,99.078 106.846,99.078 ; 105.723,101.496 105.726,101.496 ; 105.732,98.304 106.864,98.304 ; 105.732,98.331 106.855,98.331 ; 105.732,98.34 106.864,98.34 ; 105.732,98.375 106.855,98.375 ; 105.732,98.393 106.846,98.393 ; 105.732,98.411 106.855,98.411 ; 105.732,98.429 106.846,98.429 ; 105.732,98.455 106.864,98.455 ; 105.732,98.473 106.864,98.473 ; 105.732,98.482 106.864,98.482 ; 105.732,98.491 106.846,98.491 ; 105.732,98.509 106.864,98.509 ; 105.732,98.527 106.864,98.527 ; 105.732,98.535 106.855,98.535 ; 105.732,98.544 106.864,98.544 ; 105.732,98.571 106.855,98.571 ; 105.732,98.589 106.864,98.589 ; 105.732,98.607 106.846,98.607 ; 105.732,98.624 106.855,98.624 ; 105.732,98.633 106.864,98.633 ; 105.732,98.66 106.864,98.66 ; 105.732,98.669 106.846,98.669 ; 105.732,98.687 106.846,98.687 ; 105.732,98.713 106.846,98.713 ; 105.732,98.722 106.864,98.722 ; 105.732,98.749 106.864,98.749 ; 105.732,99.069 106.864,99.069 ; 105.732,99.096 106.855,99.096 ; 105.732,99.104 106.846,99.104 ; 105.732,99.113 105.735,99.113 ; 105.732,99.122 106.846,99.122 ; 105.732,99.131 105.735,99.131 ; 105.732,99.14 105.735,99.14 ; 105.732,99.158 105.735,99.158 ; 105.732,101.505 105.735,101.505 ; 105.741,99.149 106.828,99.149 ; 105.741,99.407 105.744,99.407 ; 105.741,101.496 105.744,101.496 ; 105.75,99.131 106.828,99.131 ; 105.75,99.14 106.846,99.14 ; 105.758,99.113 106.819,99.113 ; 105.758,99.158 106.819,99.158 ; 105.758,99.167 106.819,99.167 ; 105.758,99.176 106.819,99.176 ; 105.758,99.184 106.837,99.184 ; 105.758,99.193 106.819,99.193 ; 105.758,99.202 106.81,99.202 ; 105.758,101.505 105.761,101.505 ; 105.767,99.211 106.819,99.211 ; 105.767,99.22 106.819,99.22 ; 105.767,99.407 105.77,99.407 ; 105.767,101.496 106.81,101.496 ; 105.776,99.229 106.801,99.229 ; 105.776,99.238 106.81,99.238 ; 105.776,99.247 106.801,99.247 ; 105.776,99.256 106.801,99.256 ; 105.776,99.264 106.801,99.264 ; 105.776,101.505 105.779,101.505 ; 105.785,99.273 106.784,99.273 ; 105.785,99.407 106.757,99.407 ; 105.785,102.607 105.788,102.607 ; 105.794,99.282 106.793,99.282 ; 105.794,99.3 105.797,99.3 ; 105.794,99.398 105.797,99.398 ; 105.794,101.505 106.793,101.505 ; 105.794,101.523 105.797,101.523 ; 105.794,101.531 105.797,101.531 ; 105.794,102.616 105.797,102.616 ; 105.803,99.291 106.757,99.291 ; 105.803,99.309 105.806,99.309 ; 105.803,102.607 105.824,102.607 ; 105.812,99.398 105.824,99.398 ; 105.812,101.514 105.815,101.514 ; 105.812,101.531 105.815,101.531 ; 105.821,99.3 106.766,99.3 ; 105.821,99.318 106.775,99.318 ; 105.821,99.327 106.757,99.327 ; 105.83,99.309 106.757,99.309 ; 105.83,99.344 106.739,99.344 ; 105.83,101.523 105.841,101.523 ; 105.83,101.531 106.739,101.531 ; 105.83,102.616 105.841,102.616 ; 105.838,99.336 106.739,99.336 ; 105.838,99.398 106.73,99.398 ; 105.847,99.353 106.721,99.353 ; 105.847,101.514 105.868,101.514 ; 105.856,99.362 106.73,99.362 ; 105.856,99.371 106.704,99.371 ; 105.856,99.389 106.704,99.389 ; 105.856,101.523 105.859,101.523 ; 105.865,101.54 105.868,101.54 ; 105.865,102.634 105.868,102.634 ; 105.874,99.38 106.721,99.38 ; 105.874,101.523 106.721,101.523 ; 105.883,101.514 106.721,101.514 ; 105.883,101.54 105.886,101.54 ; 105.892,102.634 105.912,102.634 ; 105.892,102.643 105.904,102.643 ; 105.918,101.54 105.93,101.54 ; 105.918,101.549 105.921,101.549 ; 105.918,102.643 105.93,102.643 ; 105.927,102.634 105.93,102.634 ; 105.936,101.549 106.641,101.549 ; 105.954,102.643 105.957,102.643 ; 105.972,101.54 106.606,101.54 ; 105.981,102.652 106.019,102.652 ; 106.016,102.66 106.019,102.66 ; 106.043,102.66 106.064,102.66 ; 106.087,101.558 106.09,101.558 ; 106.087,102.652 106.09,102.652 ; 106.096,101.567 106.099,101.567 ; 106.105,101.558 106.117,101.558 ; 106.105,102.66 106.108,102.66 ; 106.132,101.558 106.153,101.558 ; 106.132,101.567 106.135,101.567 ; 106.15,101.567 106.366,101.567 ; 106.15,102.669 106.215,102.669 ; 106.15,102.678 106.161,102.678 ; 106.158,102.652 106.161,102.652 ; 106.176,101.558 106.179,101.558 ; 106.176,102.652 106.179,102.652 ; 106.176,102.678 106.215,102.678 ; 106.194,101.558 106.233,101.558 ; 106.194,102.652 106.197,102.652 ; 106.23,102.669 106.233,102.669 ; 106.23,102.678 106.233,102.678 ; 106.238,102.687 106.268,102.687 ; 106.247,101.558 106.25,101.558 ; 106.247,102.66 106.25,102.66 ; 106.256,102.678 106.277,102.678 ; 106.265,101.558 106.268,101.558 ; 106.283,101.558 106.313,101.558 ; 106.283,102.669 106.286,102.669 ; 106.283,102.687 106.304,102.687 ; 106.301,102.669 106.304,102.669 ; 106.301,102.678 106.321,102.678 ; 106.318,102.687 108.562,102.687 ; 106.327,101.558 106.33,101.558 ; 106.327,102.652 106.33,102.652 ; 106.327,102.669 106.357,102.669 ; 106.345,101.558 106.348,101.558 ; 106.345,102.678 106.348,102.678 ; 106.363,101.558 106.375,101.558 ; 106.363,102.652 106.366,102.652 ; 106.363,102.678 106.428,102.678 ; 106.381,101.567 106.393,101.567 ; 106.39,101.558 106.401,101.558 ; 106.39,102.669 106.401,102.669 ; 106.407,101.567 106.428,101.567 ; 106.416,101.558 106.428,101.558 ; 106.416,102.669 108.562,102.669 ; 106.425,102.652 106.428,102.652 ; 106.443,101.558 106.446,101.558 ; 106.443,102.652 106.446,102.652 ; 106.443,102.678 108.562,102.678 ; 106.47,101.558 106.481,101.558 ; 106.496,101.567 106.499,101.567 ; 106.496,102.652 106.508,102.652 ; 106.505,101.558 106.508,101.558 ; 106.505,102.66 106.508,102.66 ; 106.523,102.652 106.526,102.652 ; 106.541,102.652 106.561,102.652 ; 106.541,102.66 106.553,102.66 ; 106.567,102.66 106.597,102.66 ; 106.576,102.652 106.597,102.652 ; 106.594,102.634 106.597,102.634 ; 106.612,102.66 108.562,102.66 ; 106.63,101.54 106.641,101.54 ; 106.63,102.643 106.633,102.643 ; 106.63,102.652 108.562,102.652 ; 106.647,102.643 106.65,102.643 ; 106.656,101.54 106.659,101.54 ; 106.665,102.643 106.668,102.643 ; 106.674,102.634 106.686,102.634 ; 106.683,102.643 106.686,102.643 ; 106.692,101.54 106.695,101.54 ; 106.71,102.634 108.562,102.634 ; 106.71,102.643 106.713,102.643 ; 106.719,99.371 106.721,99.371 ; 106.727,102.643 108.562,102.643 ; 106.736,99.371 106.739,99.371 ; 106.736,101.514 106.739,101.514 ; 106.736,101.523 106.748,101.523 ; 106.736,102.607 106.739,102.607 ; 106.736,102.625 106.739,102.625 ; 106.745,102.616 106.748,102.616 ; 106.754,99.344 106.757,99.344 ; 106.754,99.398 106.784,99.398 ; 106.754,101.514 106.757,101.514 ; 106.772,99.291 106.784,99.291 ; 106.772,101.523 106.775,101.523 ; 106.772,102.616 106.775,102.616 ; 106.781,99.3 106.784,99.3 ; 106.781,99.309 106.784,99.309 ; 106.781,99.407 106.793,99.407 ; 106.781,101.514 106.784,101.514 ; 106.781,101.531 106.784,101.531 ; 106.79,102.607 106.793,102.607 ; 106.79,102.616 108.562,102.616 ; 106.799,99.273 106.801,99.273 ; 106.799,101.514 106.801,101.514 ; 106.799,102.625 108.562,102.625 ; 106.807,102.607 108.562,102.607 ; 106.816,99.229 106.819,99.229 ; 106.816,99.398 106.828,99.398 ; 106.825,101.496 106.828,101.496 ; 106.834,101.505 106.837,101.505 ; 106.843,99.113 106.846,99.113 ; 106.843,99.131 106.846,99.131 ; 106.843,99.149 106.846,99.149 ; 106.843,99.158 106.846,99.158 ; 106.843,99.176 106.846,99.176 ; 106.843,99.398 106.846,99.398 ; 106.843,101.496 106.846,101.496 ; 106.852,102.598 106.855,102.598 ; 106.861,98.358 106.864,98.358 ; 106.861,98.393 106.864,98.393 ; 106.861,98.402 106.864,98.402 ; 106.861,98.42 106.864,98.42 ; 106.861,98.429 106.864,98.429 ; 106.861,98.491 106.864,98.491 ; 106.861,98.518 106.864,98.518 ; 106.861,98.598 106.864,98.598 ; 106.861,98.607 106.864,98.607 ; 106.861,98.669 106.864,98.669